# EAGLE board version_0_test_ok_2 (EAGLE 8.3.1)
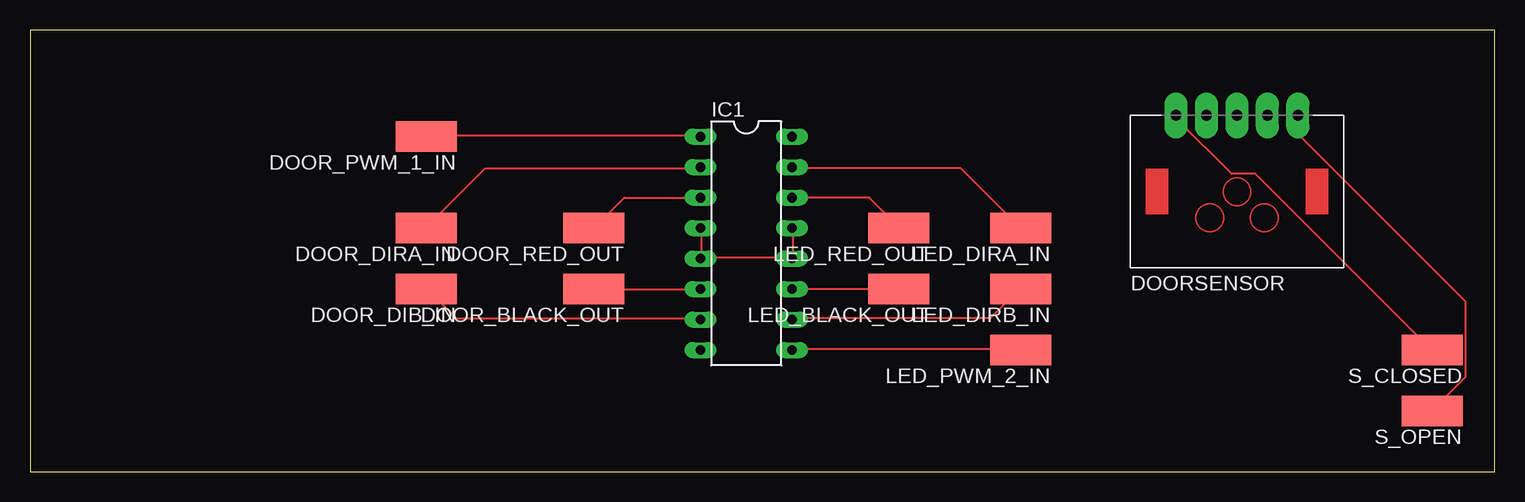
[diagram p0: board, top side]
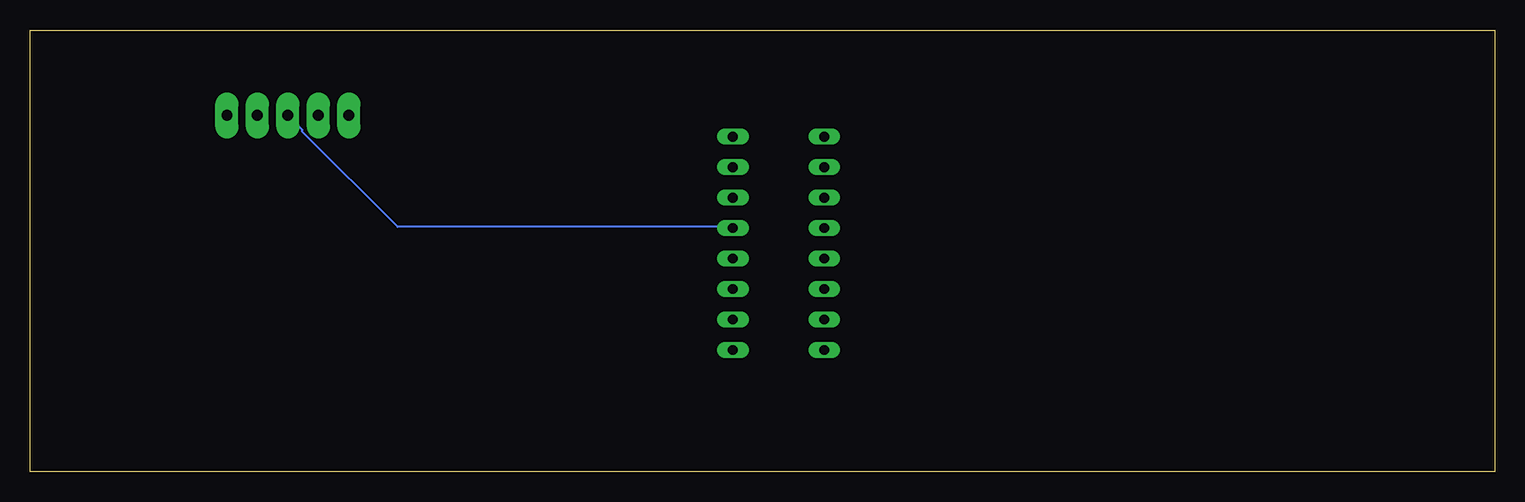
[diagram p1: board, bottom side, seen from below]

Size 122.07 x 36.83 mm. Coordinates in mm from the lower left corner, seen from the top.
Outline: 0,0 122.07,0 122.07,36.83 0,36.83 0,0
Copper layers (1*16): Top 0.035mm / dielectric 1.5mm / Bottom 0.035mm
Design rules "default": minimum track width 6mil, minimum drill 0.35mm, track to track 6mil, track to pad 6mil, pad to pad 6mil, via to via 6mil, smd to smd 6mil, copper to edge 40mil, drill to drill 6mil, minimum pad ring 10mil, minimum via ring 8mil, stop-mask expansion 4mil, vias tented up to drill 0mil, thermal gap 10mil

## Footprints (pad centres in the part's own frame; a part is rotated, then mirrored left to right if it is on the bottom)
SMD2,54-5,08 = smd 2.54 x 5.08: 1 0,0
DOORSENSOR = drill 0.9 pad 1.93 long: GND 0,6.35; L1 -5.08,6.35; L2 -2.54,6.35; R1 5.08,6.35; R2 2.54,6.35
DIL16 = drill 0.813 long: 1 -8.89,-3.81; 2 -6.35,-3.81; 3 -3.81,-3.81; 4 -1.27,-3.81; 5 1.27,-3.81; 6 3.81,-3.81; 7 6.35,-3.81; 8 8.89,-3.81; 9 8.89,3.81; 10 6.35,3.81; 11 3.81,3.81; 12 1.27,3.81; 13 -1.27,3.81; 14 -3.81,3.81; 15 -6.35,3.81; 16 -8.89,3.81

## Placement (x,y rotation side)
DOOR_BLACK_OUT  [SMD2,54-5,08]  46.99,15.24 90 top
DOOR_DIB_IN  [SMD2,54-5,08]  33.02,15.24 90 top
DOOR_DIRA_IN  [SMD2,54-5,08]  33.02,20.32 90 top
DOOR_PWM_1_IN  [SMD2,54-5,08]  33.02,27.94 90 top
DOOR_RED_OUT  [SMD2,54-5,08]  46.99,20.32 90 top
DOORSENSOR  DOORSENSOR  [DOORSENSOR]  100.58,23.37 0 top
IC1  L293E  [DIL16]  59.69,19.05 270 top
LED_BLACK_OUT  [SMD2,54-5,08]  72.39,15.24 90 top
LED_DIRA_IN  [SMD2,54-5,08]  82.55,20.32 90 top
LED_DIRB_IN  [SMD2,54-5,08]  82.55,15.24 90 top
LED_PWM_2_IN  [SMD2,54-5,08]  82.55,10.16 90 top
LED_RED_OUT  [SMD2,54-5,08]  72.39,20.32 90 top
S_CLOSED  [SMD2,54-5,08]  116.84,10.16 90 top
S_OPEN  [SMD2,54-5,08]  116.84,5.08 90 top

## Library data of the parts
DOOR_BLACK_OUT DOOR_DIB_IN DOOR_DIRA_IN DOOR_PWM_1_IN DOOR_RED_OUT LED_BLACK_OUT LED_DIRA_IN LED_DIRB_IN LED_PWM_2_IN LED_RED_OUT S_CLOSED S_OPEN = wirepad
DOORSENSOR = custom_components
IC1 = texas; MF: Arrow Electronics; MPN: L293E; OC_FARNELL: 1467711; OC_NEWARK: 89K0732

## Nets
N$1: DOORSENSOR.GND IC1.4 IC1.5 IC1.12 IC1.13
N$3: DOORSENSOR.L1 S_CLOSED.1
N$4: DOORSENSOR.R1 S_OPEN.1
N$5: DOOR_BLACK_OUT.1 IC1.6
N$6: DOOR_RED_OUT.1 IC1.3
N$7: IC1.9 LED_PWM_2_IN.1
N$8: DOOR_PWM_1_IN.1 IC1.1
N$9: DOOR_DIRA_IN.1 IC1.2
N$10: DOOR_DIB_IN.1 IC1.7
N$11: IC1.10 LED_DIRB_IN.1
N$12: IC1.15 LED_DIRA_IN.1
N$13: IC1.11 LED_BLACK_OUT.1
N$14: IC1.14 LED_RED_OUT.1
VCC: IC1.16
VCC2: IC1.8

## Tracks (layer width: path | path; a pad name or v marks a point on that pad's centre or on a via)
N$1
  Top 0.152: 55.93,17.83 55.93,20.27 IC1.4 | IC1.13 63.55,20.27 63.55,17.83 IC1.12 63.4,17.83 55.93,17.83 | 55.93,17.83 IC1.5
  Bottom 0.152: DOORSENSOR.GND 99.36,28.5 99.36,28.35 91.44,20.42 63.55,20.42 IC1.13
N$3
  Top 0.152: DOORSENSOR.L1 95.56,29.72 95.56,29.41 100.13,24.84 102.11,24.84 116.74,10.21 S_CLOSED.1
N$4
  Top 0.152: DOORSENSOR.R1 105.77,29.72 105.77,28.04 119.63,14.17 119.63,7.92 116.89,5.18 S_OPEN.1
N$5
  Top 0.152: DOOR_BLACK_OUT.1 IC1.6
N$6
  Top 0.152: IC1.3 49.53,22.86 DOOR_RED_OUT.1
N$7
  Top 0.152: IC1.9 63.55,10.21 82.45,10.21 LED_PWM_2_IN.1
N$8
  Top 0.152: IC1.1 55.78,28.04 33.07,28.04 DOOR_PWM_1_IN.1
N$9
  Top 0.152: IC1.2 55.78,25.3 37.95,25.3 33.07,20.42 DOOR_DIRA_IN.1
N$10
  Top 0.152: IC1.7 55.78,12.8 35.51,12.8 33.07,15.24 DOOR_DIB_IN.1
N$11
  Top 0.152: IC1.10 63.55,12.8 80.01,12.8 82.45,15.24 LED_DIRB_IN.1
N$12
  Top 0.152: LED_DIRA_IN.1 77.57,25.3 63.55,25.3 IC1.15
N$13
  Top 0.152: LED_BLACK_OUT.1 IC1.11
N$14
  Top 0.152: IC1.14 69.95,22.86 72.39,20.42 LED_RED_OUT.1